# EAGLE board AniBike_v2.5_MainBoard (EAGLE 5.08), part 1 of 2
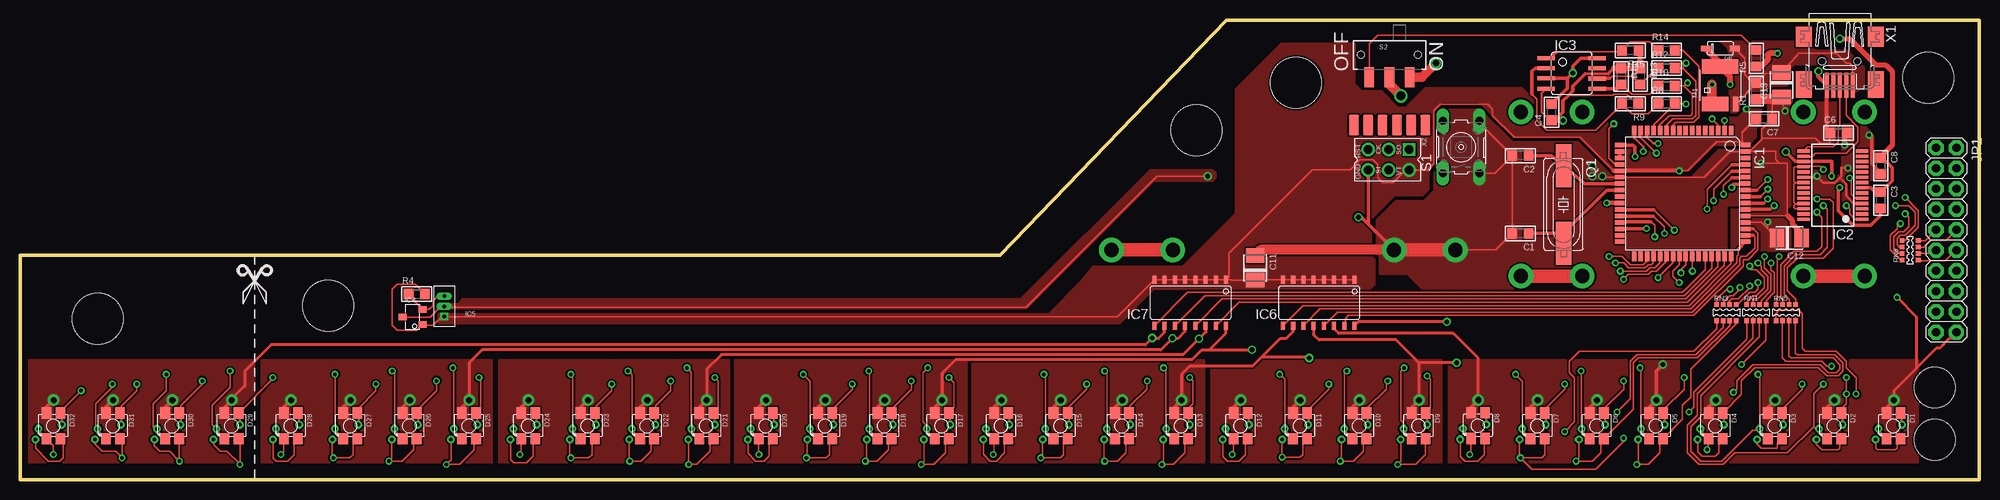
[diagram p0: board, top side]
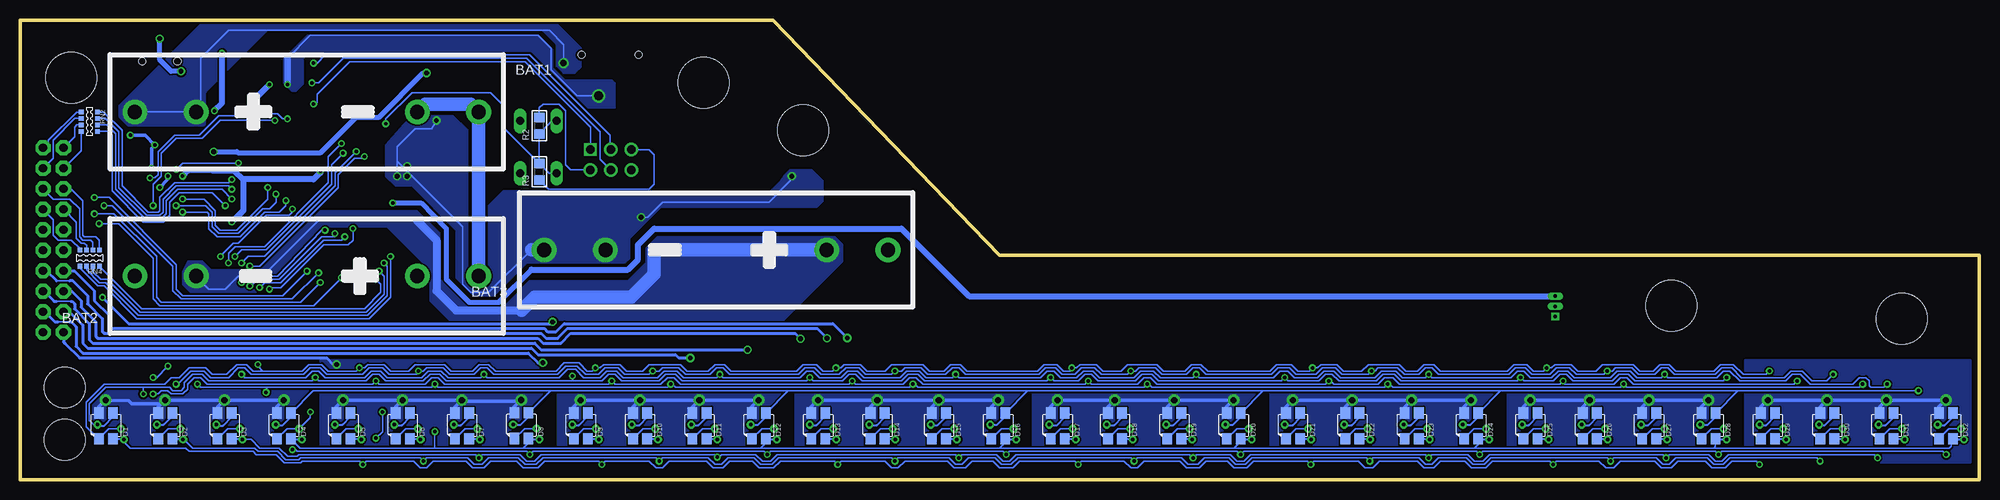
[diagram p1: board, bottom side, seen from below]

Size 243.13 x 57 mm. Coordinates in mm from the lower left corner, seen from the top.
Outline: 243.13,0 0,0 0,27.84 121.56,27.84 149.71,57 243.13,57 243.13,0
Copper layers (1*16): Top 0.035mm / dielectric 1.5mm / Bottom 0.035mm
Design rules "default *": minimum track width 7mil, minimum drill 15mil, track to track 8mil, track to pad 8mil, pad to pad 8mil, via to via 8mil, smd to smd 8mil, copper to edge 10mil, drill to drill 15mil, minimum pad ring 10mil, minimum via ring 8mil, stop-mask expansion 4mil, vias tented up to drill 0mil, thermal gap 10mil
Holes 6.35 mm at 236.78,49.83 9.6,19.96 38.25,21.59 145.95,43.33 158.34,49.23
Holes 5.08 mm at 237.59,4.93 237.59,11.43

## Footprints (pad centres in the part's own frame; a part is rotated, then mirrored left to right if it is on the bottom)
BATTERY_AAA = drill 1.778 pad 3.048 round: MINUS1 21.336,0; MINUS2 13.716,0; PLUS1 -21.336,0; PLUS2 -13.716,0
C0805 = smd 1.2 x 1.3: 1 -1.016,0; 2 1.016,0
C3528-21/T = smd 1.778 x 2.286: + 1.524,0; - -1.524,0
LED1210_DS = drill 0.432 pad 0.889 round: 1 -1.913,-0.353; 2 -2.25,-1.68; 3 1,0.15 | smd 1.2 x 1.4 bottom: 1_BOTTOM 0.85,-1.6; 2_BOTTOM -0.9,-1.6; 3_BOTTOM -0.9,1.6; 4_BOTTOM 0.85,1.6 | smd 1.2 x 1.4: 1_TOP -0.9,-1.6; 2_TOP 0.85,-1.6; 3_TOP 0.85,1.6; 4_TOP -0.9,1.6 | drill 0.762 pad 1.422 round: 4 0,3.2
SOD-123 = smd 1.2 x 0.7: ANODE -1.82,0; CATHODE 1.82,0
TQFP64 = smd 1.194 x 0.559: 1 -7.8,6; 2 -7.8,5.2; 3 -7.8,4.4; 4 -7.8,3.6; 5 -7.8,2.8; 6 -7.8,2; 7 -7.8,1.2; 8 -7.8,0.4; 9 -7.8,-0.4; 10 -7.8,-1.2; 11 -7.8,-2; 12 -7.8,-2.8; 13 -7.8,-3.6; 14 -7.8,-4.4; 15 -7.8,-5.2; 16 -7.8,-6; 33 7.8,-6; 34 7.8,-5.2; 35 7.8,-4.4; 36 7.8,-3.6; 37 7.8,-2.8; 38 7.8,-2; 39 7.8,-1.2; 40 7.8,-0.4; 41 7.8,0.4; 42 7.8,1.2; 43 7.8,2; 44 7.8,2.8; 45 7.8,3.6; 46 7.8,4.4; 47 7.8,5.2; 48 7.8,6 | smd 0.559 x 1.194: 17 -6,-7.8; 18 -5.2,-7.8; 19 -4.4,-7.8; 20 -3.6,-7.8; 21 -2.8,-7.8; 22 -2,-7.8; 23 -1.2,-7.8; 24 -0.4,-7.8; 25 0.4,-7.8; 26 1.2,-7.8; 27 2,-7.8; 28 2.8,-7.8; 29 3.6,-7.8; 30 4.4,-7.8; 31 5.2,-7.8; 32 6,-7.8; 49 6,7.8; 50 5.2,7.8; 51 4.4,7.8; 52 3.6,7.8; 53 2.8,7.8; 54 2,7.8; 55 1.2,7.8; 56 0.4,7.8; 57 -0.4,7.8; 58 -1.2,7.8; 59 -2,7.8; 60 -2.8,7.8; 61 -3.6,7.8; 62 -4.4,7.8; 63 -5.2,7.8; 64 -6,7.8
SSOP28 = smd 0.4 x 1.5: 1 -4.225,-3.625; 2 -3.575,-3.625; 3 -2.925,-3.625; 4 -2.275,-3.625; 5 -1.625,-3.625; 6 -0.975,-3.625; 7 -0.325,-3.625; 8 0.325,-3.625; 9 0.975,-3.625; 10 1.625,-3.625; 11 2.275,-3.625; 12 2.925,-3.625; 13 3.575,-3.625; 14 4.225,-3.625; 15 4.225,3.625; 16 3.575,3.625; 17 2.925,3.625; 18 2.275,3.625; 19 1.625,3.625; 20 0.975,3.625; 21 0.325,3.625; 22 -0.325,3.625; 23 -0.975,3.625; 24 -1.625,3.625; 25 -2.275,3.625; 26 -2.925,3.625; 27 -3.575,3.625; 28 -4.225,3.625
SOIC8 = smd 0.5 x 2.2: 1 -1.905,-3.154; 2 -0.645,-3.154; 3 0.625,-3.154; 4 1.895,-3.154; 5 1.905,3.154; 6 0.635,3.154; 7 -0.635,3.154; 8 -1.905,3.154
HALL_SENSOR_SE = smd 1 x 0.8: 1 1.15,-1; 2 1.15,0.9; 3 -1.35,-0.05
HALL_SENSOR_UA = drill 0.45 square: 1 0,-1.27 | drill 0.45 long: 2 0,0; 3 0,1.27
SOIC16 = smd 0.5 x 1: 1 -4.41,-2.84; 2 -3.14,-2.84; 3 -1.87,-2.84; 4 -0.6,-2.84; 5 0.67,-2.84; 6 1.94,-2.84; 7 3.21,-2.84; 8 4.48,-2.84; 9 4.48,2.84; 10 3.21,2.84; 11 1.94,2.84; 12 0.67,2.84; 13 -0.6,2.84; 14 -1.87,2.84; 15 -3.14,2.84; 16 -4.41,2.84
2X10 = drill 1.016 pad 1.88 octagon: 1 -11.43,-1.27; 2 -11.43,1.27; 3 -8.89,-1.27; 4 -8.89,1.27; 5 -6.35,-1.27; 6 -6.35,1.27; 7 -3.81,-1.27; 8 -3.81,1.27; 9 -1.27,-1.27; 10 -1.27,1.27; 11 1.27,-1.27; 12 1.27,1.27; 13 3.81,-1.27; 14 3.81,1.27; 15 6.35,-1.27; 16 6.35,1.27; 17 8.89,-1.27; 18 8.89,1.27; 19 11.43,-1.27; 20 11.43,1.27
PMOS_SO-8 = smd 3.3 x 1.78: 1 -0.635,-2.326 | smd 0.72 x 1.78: 2 1.905,-2.326 | smd 4.53 x 1.78: 3 0,2.326
HC49UP = smd 5.334 x 1.93: 1 -4.826,0; 2 4.826,0
R0805 = smd 1.2 x 1.3: 1 -1.016,0; 2 1.016,0
YCTC164 = smd 0.559 x 0.6: P$1 -1.2,-1.003; P$2 -0.4,-1.003; P$3 0.4,-1.003; P$4 1.2,-1.003; P$5 1.2,1.003; P$6 0.4,1.003; P$7 -0.4,1.003; P$8 -1.2,1.003
B3F-10XX = drill 1.016 long: 1 -3.251,2.261; 2 3.251,2.261; 3 -3.251,-2.261; 4 3.251,-2.261
SWITCH-SPDT-SMD = smd 1.2 x 2.5: 1 -2.5,-2.75; 2 0,-2.75; 3 2.5,-2.75 | hole 0.9: -3.55,0; 3.55,0
32005-201 = smd 3.1 x 0.5: 1 3,1.6; 2 3,0.8; 3 3,0; 4 3,-0.8; 5 3,-1.6 | smd 2.5 x 2: M1 -3,-4.45; M2 -3,4.45 | smd 3.3 x 2: M3 2.9,4.45; M4 2.9,-4.45 | hole 0.9: 0,2.2; 0,-2.2
AVR_ISP_ANIBIKE = drill 1.067 square: 1 0,2.54 | drill 1.067 pad 1.676 round: 2 2.54,2.54; 3 0,0; 4 2.54,0; 5 0,-2.54; 6 2.54,-2.54 | smd 2.54 x 1.27: 7 -3.048,2.794; 8 -3.048,4.572; 9 -3.048,-0.762; 10 -3.048,1.016; 11 -3.048,-2.54; 12 -3.048,-4.318

## Placement (x,y rotation side)
BAT1  BATTERY_AAA  [BATTERY_AAA]  207.57,45.62 0 bottom
BAT2  BATTERY_AAA  [BATTERY_AAA]  207.57,25.25 180 bottom
BAT3  BATTERY_AAA  [BATTERY_AAA]  156.77,28.5 180 bottom
C1  22pF  [C0805]  186.18,30.53 180 top
C2  22pF  [C0805]  186.18,40.18 180 top
C3  100nF  [C0805]  230.89,34.65 270 top
C4  100nF  [C0805]  190.07,45.59 90 top
C6  100nF  [C0805]  225.65,42.98 0 top
C7  100nF  [C0805]  216.41,44.75 180 top
C8  100nF  [C0805]  230.89,38.91 270 top
C11  47uF  [C3528-21/T]  153.26,26.26 270 top
C12  10uF  [C3528-21/T]  219.56,29.97 180 top
C13  10uF  [C3528-21/T]  218.59,48.97 90 top
D1  LED_RGB_DS  [LED1210_DS]  232.51,6.65 0 top
D2  LED_RGB_DS  [LED1210_DS]  225.15,6.65 0 top
D3  LED_RGB_DS  [LED1210_DS]  217.78,6.65 0 top
D4  LED_RGB_DS  [LED1210_DS]  210.41,6.65 0 top
D5  LED_RGB_DS  [LED1210_DS]  203.05,6.65 0 top
D6  LED_RGB_DS  [LED1210_DS]  195.68,6.65 0 top
D7  LED_RGB_DS  [LED1210_DS]  188.32,6.65 0 top
D8  LED_RGB_DS  [LED1210_DS]  180.95,6.68 0 top
D9  LED_RGB_DS  [LED1210_DS]  173.58,6.65 0 top
D10  LED_RGB_DS  [LED1210_DS]  166.22,6.65 0 top
D11  LED_RGB_DS  [LED1210_DS]  158.85,6.65 0 top
D12  LED_RGB_DS  [LED1210_DS]  151.49,6.65 0 top
D13  LED_RGB_DS  [LED1210_DS]  144.12,6.65 0 top
D14  LED_RGB_DS  [LED1210_DS]  136.75,6.65 0 top
D15  LED_RGB_DS  [LED1210_DS]  129.13,6.65 0 top
D16  LED_RGB_DS  [LED1210_DS]  121.77,6.65 0 top
D17  LED_RGB_DS  [LED1210_DS]  114.4,6.65 0 top
D18  LED_RGB_DS  [LED1210_DS]  107.29,6.65 0 top
D19  LED_RGB_DS  [LED1210_DS]  99.92,6.65 0 top
D20  LED_RGB_DS  [LED1210_DS]  92.56,6.65 0 top
D21  LED_RGB_DS  [LED1210_DS]  85.19,6.65 0 top
D22  LED_RGB_DS  [LED1210_DS]  77.83,6.65 0 top
D23  LED_RGB_DS  [LED1210_DS]  70.46,6.65 0 top
D24  LED_RGB_DS  [LED1210_DS]  63.09,6.65 0 top
D25  LED_RGB_DS  [LED1210_DS]  55.73,6.65 0 top
D26  LED_RGB_DS  [LED1210_DS]  48.36,6.65 0 top
D27  LED_RGB_DS  [LED1210_DS]  41,6.65 0 top
D28  LED_RGB_DS  [LED1210_DS]  33.63,6.65 0 top
D29  LED_RGB_DS  [LED1210_DS]  26.26,6.65 0 top
D30  LED_RGB_DS  [LED1210_DS]  18.9,6.65 0 top
D31  LED_RGB_DS  [LED1210_DS]  11.53,6.65 0 top
D32  LED_RGB_DS  [LED1210_DS]  4.17,6.65 0 top
D40  SM5819A  [SOD-123]  210.97,53.49 180 top
IC1  ATMEGA325P  [TQFP64]  206.3,35.51 270 top
IC2  FT232RL  [SSOP28]  224.94,36.53 90 top
IC3  AT26DF321  [SOIC8]  192.53,50.39 270 top
IC4  HALL_SENSORSMT  [HALL_SENSOR_SE]  48.82,20.22 0 top
IC5  HALL_SENSORTH  [HALL_SENSOR_UA]  52.63,21.49 0 top
IC6  MMPQ2222  [SOIC16]  161.19,21.95 180 top
IC7  MMPQ2222  [SOIC16]  145.24,21.95 180 top
JP1  [2X10]  239.01,29.72 270 top
M1  IRF7404  [PMOS_SO-8]  210.97,48.92 0 top
Q1  20MHz  [HC49UP]  191.52,34.14 270 top
R1  3000  [R0805]  215.44,48.21 90 top
R2  5K  [R0805]  178.71,43.89 90 bottom
R3  100  [R0805]  178.71,38.2 90 bottom
R4  10K  [R0805]  49.23,23.01 0 top
R5  3000  [R0805]  215.44,52.27 90 top
R8  301  [R0805]  204.32,46.63 0 top
R9  650  [R0805]  199.8,46.63 180 top
R10  301  [R0805]  204.32,48.84 0 top
R11  650  [R0805]  198.65,50.01 270 top
R12  301  [R0805]  204.32,51.05 0 top
R13  650  [R0805]  201.04,50.01 270 top
R14  15k  [R0805]  204.32,53.24 0 top
R15  33k  [R0805]  199.82,53.24 180 top
RN1  RESISTOR_ARR4  [YCTC164]  215.44,20.73 0 top
RN2  RESISTOR_ARR4  [YCTC164]  234.54,44.4 270 bottom
RN3  RESISTOR_ARR4  [YCTC164]  211.73,20.73 0 top
RN4  RESISTOR_ARR4  [YCTC164]  234.49,27.48 180 bottom
RN5  RESISTOR_ARR4  [YCTC164]  219.13,20.73 0 top
RN6  RESISTOR_ARR4  [YCTC164]  234.54,28.45 90 top
S1  Open  [B3F-10XX]  178.82,41.25 90 top
S2  [SWITCH-SPDT-SMD]  169.93,52.68 0 top
X1  MINI-USB-32005-201  [32005-201]  225.81,51.92 270 top
X2  AVR_ISP_ANIBIKE  [AVR_ISP_ANIBIKE]  169.82,40.94 270 top

## Library data of the parts
BAT1-BAT3 C1-C4 C6-C8 C11-C13 IC3 Q1 R1-R5 S1 X1 = AniBike_v3.0_Library
D1-D32 D40 IC4-IC7 M1 R8-R15 RN1-RN6 X2 = AniBike_Common_Library
IC1 = atmel
IC2 = ftdichip
JP1 S2 = SparkFun

## Nets
+3V3: C3.2 C4.2 IC2.17 IC3.3 IC3.8
+5V: C6.2 C7.2 C8.2 C11.+ C12.+ D40.CATHODE IC1.21 IC1.52 IC1.64 IC2.4 IC2.20 IC4.1 IC5.1 IC6.1 IC6.2 IC6.3 IC6.4 IC6.5 IC6.6 IC6.7 IC6.8 IC7.1 IC7.2 IC7.3 IC7.4 IC7.5 IC7.6 IC7.7 IC7.8 M1.3 R2.2 R4.2 X2.2
CS: IC1.10 R14.2
CS_FLASH: IC3.1 R14.1 R15.2
D+: IC2.15 X1.3
D-: IC2.16 X1.2
GND: BAT3.MINUS1 BAT3.MINUS2 C1.2 C2.2 C3.1 C4.1 C6.1 C7.1 C8.1 C11.- C12.- C13.- IC1.22 IC1.53 IC1.63 IC2.7 IC2.18 IC2.21 IC2.25 IC2.26 IC3.4 IC4.3 IC5.2 R1.1 R5.1 R9.1 R11.1 R13.1 R15.1 S1.3 S1.4 X1.5 X2.6
INT_SENSOR: IC1.26 IC4.2 IC5.3 R4.1
L1_B1: IC1.61 RN5.P$8
L1_B1_LED: D1.3 D1.3_BOTTOM D1.3_TOP D5.3 D5.3_BOTTOM D5.3_TOP D9.3 D9.3_BOTTOM D9.3_TOP D13.3 D13.3_BOTTOM D13.3_TOP D17.3 D17.3_BOTTOM D17.3_TOP D21.3 D21.3_BOTTOM D21.3_TOP D25.3 D25.3_BOTTOM D25.3_TOP D29.3 D29.3_BOTTOM D29.3_TOP RN5.P$1
L1_B2: IC1.60 RN5.P$7
L1_B2_LED: D2.3 D2.3_BOTTOM D2.3_TOP D6.3 D6.3_BOTTOM D6.3_TOP D10.3 D10.3_BOTTOM D10.3_TOP D14.3 D14.3_BOTTOM D14.3_TOP D18.3 D18.3_BOTTOM D18.3_TOP D22.3 D22.3_BOTTOM D22.3_TOP D26.3 D26.3_BOTTOM D26.3_TOP D30.3 D30.3_BOTTOM D30.3_TOP RN5.P$2
L1_B3: IC1.59 RN5.P$6
L1_B3_LED: D3.3 D3.3_BOTTOM D3.3_TOP D7.3 D7.3_BOTTOM D7.3_TOP D11.3 D11.3_BOTTOM D11.3_TOP D15.3 D15.3_BOTTOM D15.3_TOP D19.3 D19.3_BOTTOM D19.3_TOP D23.3 D23.3_BOTTOM D23.3_TOP D27.3 D27.3_BOTTOM D27.3_TOP D31.3 D31.3_BOTTOM D31.3_TOP RN5.P$3
L1_B4: IC1.58 RN5.P$5
L1_B4_LED: D4.3 D4.3_BOTTOM D4.3_TOP D8.3 D8.3_BOTTOM D8.3_TOP D12.3 D12.3_BOTTOM D12.3_TOP D16.3 D16.3_BOTTOM D16.3_TOP D20.3 D20.3_BOTTOM D20.3_TOP D24.3 D24.3_BOTTOM D24.3_TOP D28.3 D28.3_BOTTOM D28.3_TOP D32.3 D32.3_BOTTOM D32.3_TOP RN5.P$4
L1_G1: IC1.27 RN3.P$5
L1_G1_LED: D1.2 D1.2_BOTTOM D1.2_TOP D5.2 D5.2_BOTTOM D5.2_TOP D9.2 D9.2_BOTTOM D9.2_TOP D13.2 D13.2_BOTTOM D13.2_TOP D17.2 D17.2_BOTTOM D17.2_TOP D21.2 D21.2_BOTTOM D21.2_TOP D25.2 D25.2_BOTTOM D25.2_TOP D29.2 D29.2_BOTTOM D29.2_TOP RN3.P$4
L1_G2: IC1.28 RN3.P$6
L1_G2_LED: D2.2 D2.2_BOTTOM D2.2_TOP D6.2 D6.2_BOTTOM D6.2_TOP D10.2 D10.2_BOTTOM D10.2_TOP D14.2 D14.2_BOTTOM D14.2_TOP D18.2 D18.2_BOTTOM D18.2_TOP D22.2 D22.2_BOTTOM D22.2_TOP D26.2 D26.2_BOTTOM D26.2_TOP D30.2 D30.2_BOTTOM D30.2_TOP RN3.P$3
L1_G3: IC1.29 RN3.P$7
L1_G3_LED: D3.2 D3.2_BOTTOM D3.2_TOP D7.2 D7.2_BOTTOM D7.2_TOP D11.2 D11.2_BOTTOM D11.2_TOP D15.2 D15.2_BOTTOM D15.2_TOP D19.2 D19.2_BOTTOM D19.2_TOP D23.2 D23.2_BOTTOM D23.2_TOP D27.2 D27.2_BOTTOM D27.2_TOP D31.2 D31.2_BOTTOM D31.2_TOP RN3.P$2
L1_G4: IC1.30 RN3.P$8
L1_G4_LED: D4.2 D4.2_BOTTOM D4.2_TOP D8.2 D8.2_BOTTOM D8.2_TOP D12.2 D12.2_BOTTOM D12.2_TOP D16.2 D16.2_BOTTOM D16.2_TOP D20.2 D20.2_BOTTOM D20.2_TOP D24.2 D24.2_BOTTOM D24.2_TOP D28.2 D28.2_BOTTOM D28.2_TOP D32.2 D32.2_BOTTOM D32.2_TOP RN3.P$1
L1_R1: IC1.14 RN1.P$5
L1_R1_LED: D1.1 D1.1_BOTTOM D1.1_TOP D5.1 D5.1_BOTTOM D5.1_TOP D9.1 D9.1_BOTTOM D9.1_TOP D13.1 D13.1_BOTTOM D13.1_TOP D17.1 D17.1_BOTTOM D17.1_TOP D21.1 D21.1_BOTTOM D21.1_TOP D25.1 D25.1_BOTTOM D25.1_TOP D29.1 D29.1_BOTTOM D29.1_TOP RN1.P$4
L1_R2: IC1.16 RN1.P$7
L1_R2_LED: D2.1 D2.1_BOTTOM D2.1_TOP D6.1 D6.1_BOTTOM D6.1_TOP D10.1 D10.1_BOTTOM D10.1_TOP D14.1 D14.1_BOTTOM D14.1_TOP D18.1 D18.1_BOTTOM D18.1_TOP D22.1 D22.1_BOTTOM D22.1_TOP D26.1 D26.1_BOTTOM D26.1_TOP D30.1 D30.1_BOTTOM D30.1_TOP RN1.P$2
L1_R3: IC1.15 RN1.P$6
L1_R3_LED: D3.1 D3.1_BOTTOM D3.1_TOP D7.1 D7.1_BOTTOM D7.1_TOP D11.1 D11.1_BOTTOM D11.1_TOP D15.1 D15.1_BOTTOM D15.1_TOP D19.1 D19.1_BOTTOM D19.1_TOP D23.1 D23.1_BOTTOM D23.1_TOP D27.1 D27.1_BOTTOM D27.1_TOP D31.1 D31.1_BOTTOM D31.1_TOP RN1.P$3
L1_R4: IC1.17 RN1.P$8
L1_R4_LED: D4.1 D4.1_BOTTOM D4.1_TOP D8.1 D8.1_BOTTOM D8.1_TOP D12.1 D12.1_BOTTOM D12.1_TOP D16.1 D16.1_BOTTOM D16.1_TOP D20.1 D20.1_BOTTOM D20.1_TOP D24.1 D24.1_BOTTOM D24.1_TOP D28.1 D28.1_BOTTOM D28.1_TOP D32.1 D32.1_BOTTOM D32.1_TOP RN1.P$1
L2_B1: IC1.39 RN6.P$8
L2_B1_LED: JP1.12 RN6.P$1
L2_B2: IC1.40 RN6.P$7
L2_B2_LED: JP1.11 RN6.P$2
L2_B3: IC1.41 RN6.P$6
L2_B3_LED: JP1.10 RN6.P$3
L2_B4: IC1.42 RN6.P$5
L2_B4_LED: JP1.9 RN6.P$4
L2_G1: IC1.35 RN4.P$5
L2_G1_LED: JP1.8 RN4.P$4
L2_G2: IC1.36 RN4.P$6
L2_G2_LED: JP1.7 RN4.P$3
L2_G3: IC1.37 RN4.P$7
L2_G3_LED: JP1.6 RN4.P$2
L2_G4: IC1.38 RN4.P$8
L2_G4_LED: JP1.5 RN4.P$1
L2_R1: IC1.57 RN2.P$8
L2_R1_LED: JP1.2 RN2.P$1
L2_R2: IC1.56 RN2.P$7
L2_R2_LED: JP1.4 RN2.P$2
L2_R3: IC1.55 RN2.P$6
L2_R3_LED: JP1.1 RN2.P$3
L2_R4: IC1.54 RN2.P$5
L2_R4_LED: JP1.3 RN2.P$4
L2_SENSE_IN: IC1.34
L2_SENSE_OUT: IC1.33
MISO: IC1.13 R8.2 X2.1
MISO_FLASH: IC3.2 R8.1 R9.2
MOSI: IC1.12 R10.2 X2.4
MOSI_FLASH: IC3.5 R10.1 R11.2
N$1: C2.1 IC1.23 Q1.1
N$2: C1.1 IC1.24 Q1.2
N$4: BAT2.MINUS1 BAT2.MINUS2 BAT3.PLUS1 BAT3.PLUS2
N$5: BAT1.MINUS1 BAT1.MINUS2 BAT2.PLUS1 BAT2.PLUS2
N$6: R5.2 S2.1
N$7: IC1.18 IC1.19
N$8: IC1.20 R2.1 R3.2 S1.1 S1.2
RESET: R3.1 X2.5
ROW1: IC1.51 IC6.15
ROW1_LED: D1.4 D1.4_BOTTOM D1.4_TOP D2.4 D2.4_BOTTOM D2.4_TOP D3.4 D3.4_BOTTOM D3.4_TOP D4.4 D4.4_BOTTOM D4.4_TOP IC6.16 JP1.20
ROW2: IC1.50 IC6.13
ROW2_LED: D5.4 D5.4_BOTTOM D5.4_TOP D6.4 D6.4_BOTTOM D6.4_TOP D7.4 D7.4_BOTTOM D7.4_TOP D8.4 D8.4_BOTTOM D8.4_TOP IC6.14 JP1.19
ROW3: IC1.49 IC6.11
ROW3_LED: D9.4 D9.4_BOTTOM D9.4_TOP D10.4 D10.4_BOTTOM D10.4_TOP D11.4 D11.4_BOTTOM D11.4_TOP D12.4 D12.4_BOTTOM D12.4_TOP IC6.12 JP1.18
ROW4: IC1.48 IC6.9
ROW4_LED: D13.4 D13.4_BOTTOM D13.4_TOP D14.4 D14.4_BOTTOM D14.4_TOP D15.4 D15.4_BOTTOM D15.4_TOP D16.4 D16.4_BOTTOM D16.4_TOP IC6.10 JP1.17
ROW5: IC1.47 IC7.15
ROW5_LED: D17.4 D17.4_BOTTOM D17.4_TOP D18.4 D18.4_BOTTOM D18.4_TOP D19.4 D19.4_BOTTOM D19.4_TOP D20.4 D20.4_BOTTOM D20.4_TOP IC7.16 JP1.16
ROW6: IC1.46 IC7.13
ROW6_LED: D21.4 D21.4_BOTTOM D21.4_TOP D22.4 D22.4_BOTTOM D22.4_TOP D23.4 D23.4_BOTTOM D23.4_TOP D24.4 D24.4_BOTTOM D24.4_TOP IC7.14 JP1.15
ROW7: IC1.45 IC7.11
ROW7_LED: D25.4 D25.4_BOTTOM D25.4_TOP D26.4 D26.4_BOTTOM D26.4_TOP D27.4 D27.4_BOTTOM D27.4_TOP D28.4 D28.4_BOTTOM D28.4_TOP IC7.12 JP1.14
ROW8: IC1.44 IC7.9
ROW8_LED: D29.4 D29.4_BOTTOM D29.4_TOP D30.4 D30.4_BOTTOM D30.4_TOP D31.4 D31.4_BOTTOM D31.4_TOP D32.4 D32.4_BOTTOM D32.4_TOP IC7.10 JP1.13
RXD: IC1.3 IC2.5
SCK: IC1.11 R12.2 X2.3
SCK_FLASH: IC3.6 R12.1 R13.2
TXD: IC1.2 IC2.1
USB5V: C13.+ D40.ANODE M1.2 R1.2 X1.1
VCC_BAT: BAT1.PLUS1 BAT1.PLUS2 S2.3
VCC_SW_BAT: M1.1 S2.2

## Tracks (layer width: path | path; a pad name or v marks a point on that pad's centre or on a via)
+3V3  (via drill 0.43, 0.6)
  Top 0.203: 195.66,52.27 IC3.8
  Top 0.406: C3.2 230.89,32.77 229.67,31.55 227.43,31.55 225.6,33.38 225.6,35.81 v225.81,36.22 | v219.1,40.69 220.32,39.47 221.3,39.47 IC2.17 222.35,39.47 224.79,39.47 v224.79,37.64 | 192.01,49.77 v192.68,50.44 192.68,51.26 193.7,52.27 195.66,52.27 | 192.01,49.77 IC3.3 | C4.2 192.01,48.55 192.01,49.77
  Bottom 0.406: v224.79,37.64 224.79,37.24 v225.81,36.22
  Bottom 0.61: v192.68,50.44 193.09,50.44 198.58,44.96 201.42,44.96 205.82,40.56 216.13,40.56 216.26,40.69 v219.1,40.69
+5V  (via drill 0.43)
  Top 0.203: 230.89,38.05 C8.2 | 213.7,41.91 210.57,41.91 206.96,38.31 v205.89,38.31 | 213.7,41.91 IC1.64 | IC1.52 216.1,31.91 216.86,31.14 | 216.86,31.14 C12.+ | IC7.1 IC7.2 IC7.3 IC7.4 IC7.5 IC7.6 IC7.7 IC7.8 136.19,20.22 IC5.1 52.32,20.22 51.26,19.15 50.04,19.15 IC4.1 49.9,19.22 49.22,18.54 46.79,18.54 46.18,19.15 46.18,23.62 46.79,24.23 49.02,24.23 R4.2 | IC6.8 IC6.7 IC6.6 IC6.5 IC6.4 IC6.3 IC6.2 IC6.1 | IC6.8 156.27,24.79 | IC7.1 150.26,24.79 150.31,24.74 C11.+ 153.31,24.79 IC6.8 | v216.86,31.95 216.86,31.14 | 213.7,41.91 213.7,43.06 C7.2 215.39,44.81 v214.22,45.97 | IC1.21 198.3,38.3 | 197.71,38.3 193.57,42.44 185.45,42.44 182.73,45.16 182.73,45.97 182.12,46.58 176.22,46.58 175.41,45.77 175.41,39.27 174.55,38.4 X2.2 171.91,38.4 170.33,36.83 169.11,36.83 168.5,37.44 168.5,39.07 167.89,39.67 166.27,39.67 165.05,38.46 160.38,38.46 150.01,28.09 150.01,25.15 IC7.1 | M1.3 210.97,51.67
  Top 0.305: IC2.4 227.57,34.25 226.62,35.2 226.62,36.63 225.81,37.44 | v226.82,38.66 226.01,38.66 226.01,37.64 225.81,37.44 | IC2.20 223.22,37.5 v222.96,37.64 223.77,36.83 225.2,36.83 225.81,37.44
  Top 0.406: 230.89,38.05 229.77,39.17 229.77,42.42 v229.46,42.72
  Top 0.508: v205.89,38.31 IC1.21 | 198.3,38.3 197.71,38.3
  Top 0.61: v226.42,41.5 226.42,42.93 C6.2
  Top 0.762: 210.97,51.67 D40.CATHODE | M1.3 212.19,50.03 v212.19,49.02
  Bottom 0.203: X2.2 172.41,38.46 174.8,38.46 175.41,39.07 175.41,45.77 176.22,46.58 178.26,46.58 178.71,46.13 R2.2
  Bottom 0.406: v226.82,38.66 226.82,41.1 v226.42,41.5 227.63,42.72 v229.46,42.72
  Bottom 0.762: v222.96,37.64 222.25,38.35 216.48,38.28 215.44,37.24 | 215.44,37.24 206.7,37.24 205.89,38.05 v205.89,38.31 | 215.44,37.24 215.44,33.38 v216.86,31.95 | v212.19,49.02 214.22,46.99 v214.22,45.97
  pour Top (no thermals): 227.76,34.65 229.08,34.65 229.08,31.42 219.79,31.5 219.71,31.34 219.71,28.68 219.38,28.35 215.06,28.35 214.76,28.65 213.08,28.65 212.37,28.55 212.37,33.55 214.07,33.55 214.25,32.36 220.12,32.36 220.12,38.38 223.32,38.38 223.9,37.77 226.09,37.74 226.09,39.07 226.11,43.97 226.24,44.09 228.78,44.09 230.05,42.57 230.05,38.51 231.57,38.51 231.57,37.24 231.44,37.11 227,37.11 226.57,36.68 226.57,36.25
  pour Top (no thermals): 214.02,45.97 216.05,45.97 216.05,44.35 215.44,43.74 215.44,42.52 214.43,41.5 210.16,41.5 207.11,38.46 197.56,38.46 193.5,42.52 185.37,42.52 181.1,46.79 176.43,46.79 175.41,45.77 175.41,39.07 174.8,38.46 174.8,36.02 173.99,35.2 170.54,35.2 167.69,32.36 167.69,27.69 168.1,27.28 168.1,24.23 167.49,23.62 140.67,23.62 136.4,19.35 52.07,19.35 51.87,19.56 51.87,20.78 52.07,20.57 127.66,20.57 131.72,24.64 133.15,26.47 144.32,26.47 150.83,32.97 150.83,48.41 156.51,54.1 165.66,54.1 165.66,49.02 166.47,48.21 168.91,48.21 170.94,46.18 171.96,46.18 174.4,48.62 186.39,48.62 188.01,46.99 188.01,44.55 189.23,43.33 195.53,43.33 198.17,45.97 207.52,45.97 208.53,44.96 213.21,44.96 213.82,45.57 213.82,45.77
CS
  Top 0.203: IC1.10 205.1,43.96 205.49,44.35 207.72,44.35 208.33,44.96 208.33,51.26 206.35,53.24 R14.2
CS_FLASH
  Top 0.203: R14.1 202.23,54.31 199.8,54.31 198.81,53.31 R15.2 198.65,53.09 190.65,53.09 | 189.86,52.3 IC3.1
  Top 0.406: 190.65,53.09 189.86,52.3
D+
  Top 0.203: IC2.15 221.87,41.3 224.99,41.3 225.6,41.91 225.6,43.74 225.81,43.94 X1.3
D-
  Top 0.203: IC2.16 221.34,40.08 222.35,40.08 222.76,40.49 226.62,40.49 228.04,41.91 228.04,43.74 226.61,45.17 X1.2
GND  (via drill 0.43, 0.6)
  Top 0.203: 224.18,50.11 224.19,49.83 224.21,49.81 X1.5 | 228.59,36.22 IC2.7 | C8.1 231.04,39.93 | IC2.26 221.3,33.58 220.32,33.58 220.12,33.78 220.12,33.99 220.38,34.25 IC2.25 221.26,34.19 220.32,34.19 220.12,34.39 220.12,36.63 220.34,36.85 IC2.21 221.3,36.83 220.32,36.83 220.12,37.03 220.12,38.66 220.26,38.8 IC2.18 221.38,38.86 223.37,38.86 v223.77,38.46 | IC1.63 217.86,40.71 217.88,40.69 217.88,39.67 218.29,39.27 | 218.29,39.27 219.3,39.27 219.3,32.77 219.25,32.71 IC1.53 | C12.- 221.34,29.01 | v216.05,39.27 218.29,39.27 | C2.2 C1.2 183.13,28.5 BAT3.MINUS1 | 216.15,42.21 214.65,40.71 IC1.63 | 216.15,42.21 216.26,42.32 222.76,42.32 223.37,41.71 224.59,41.71 224.59,42.93 C6.1 224.21,43.41 | IC1.63 214.08,40.69 212.19,40.69 209.01,37.51 IC1.22 196.46,37.51 v196.34,37.64 | 201.04,53.04 R15.1 | C2.2 181.08,44.27 S1.4 | C2.2 182.98,38 S1.3 | 190.47,44.58 C4.1 189.81,44.58 189.84,44.55 | R9.1 200.25,47.19 200,47.19 199.39,47.8 197.76,47.8 197.66,47.7 192.18,47.7 | 216.15,42.21 216.15,43.48 C7.1 217.42,46.76 217.86,47.19 C13.- 218.26,47.57 v219.02,45.75 | IC4.3 50.85,20.17 52.17,21.49 IC5.2 52.73,21.39 124.82,21.39 141.07,37.64 v147.37,37.64
  Top 0.254: IC3.4 188.82,47.94 188.82,45.57 189.81,44.58
  Top 0.305: 194.23,50.37 197.08,50.37
  Top 0.406: 228.59,36.22 229.67,36.22 230.23,35.66 C3.1 232.31,37.08 232.31,38.66 231.04,39.93 | 197.08,50.37 197.76,51.05 | 194.23,50.37 192.68,48.82 192.68,48.21 192.18,47.7 191.46,46.99 191.46,45.57 190.47,44.58
  Top 0.457: 167.28,31.7 X2.6 | v166.06,32.56 166.42,32.56 167.28,31.7 | BAT3.MINUS2 167.28,31.7
  Top 0.508: 224.21,43.41 X1.5 223.16,49.96 v223.16,50.65
  Top 0.61: 201.04,53.04 R13.1 R11.1 197.87,51.05 197.76,51.05 | v191.46,44.55 189.84,44.55 | C8.1 230.89,40.03 232.31,41.45 232.31,50.65 231.5,51.46 230.28,51.46 227.02,54.71 v225.81,54.71
  Top 0.635: 219.3,32.77 219.91,32.16 219.91,31.75 220.93,30.73 C12.-
  Top 0.762: R5.1 216.05,51.26 216.86,52.07 216.86,52.68 217.07,52.88 v218.08,52.88
  Top 1.27: 217.86,47.19 R1.1 | C11.- 153.97,28.5 BAT3.MINUS2
  Top 1.676: BAT3.MINUS1 BAT3.MINUS2
  Bottom 0.203: v216.05,39.27 222.96,39.27 v223.77,38.46 | v191.46,44.55 192.07,43.54 194.11,43.54 196.34,41.3 196.34,39.47 | v196.34,37.64 196.34,39.47 | 196.34,39.47 188.21,31.34 188.21,24.23 187.2,23.22 184.96,23.22 179.68,28.5 | v166.06,32.56 165.25,32.56 163.42,34.39 150.22,34.39 147.37,37.24 v147.37,37.64
  Bottom 0.61: v225.81,54.71 225.81,52.07 224.38,50.65 v223.16,50.65
  Bottom 0.762: v218.08,52.88 218.06,46.71 v219.02,45.75
  Bottom 1.676: 179.68,28.5 BAT3.MINUS1
  other vias: 195.12,37.64 195.12,38.86
  pour Bottom (no thermals): 177.04,35.81 183.13,35.81 184.96,33.99 184.96,24.84 185.98,23.83 186.59,23.83 187.6,24.84 187.6,43.33 189.43,45.16 194.54,45.16 197.76,41.5 197.76,37.64 196.55,36.42 194.51,36.42 189.03,30.94 189.03,25.04 186.79,22.81 184.35,22.81 180.29,26.87 168.1,26.87 167.49,27.48 167.49,29.92 163.63,33.78 144.32,33.78 143.51,34.59 143.51,37.03 144.93,38.46 147.57,38.46 148.18,37.85 148.79,37.03 150.22,35.61 176.83,35.61
  pour Top (no thermals): 168.3,28.09 168.3,32.16 170.74,34.59 174.19,34.59 175.41,35.81 175.41,38.05 176.02,38.66 176.02,45.36 176.63,45.97 181.1,45.97 185.17,41.91 193.29,41.91 197.76,37.44 207.31,37.44 210.77,40.89 215.04,40.89 215.04,41.1 216.05,42.11 216.05,43.54 216.87,44.35 216.87,47.6 217.47,48.21 219.91,48.21 219.91,46.79 230.28,46.79 230.48,46.58 230.48,45.57 229.87,44.75 225.6,44.75 225.6,40.08 219.71,40.08 219.71,33.99 219.3,33.58 219.3,32.77 214.63,32.77 214.63,33.99 211.79,33.99 211.79,24.84 209.96,23.01 209.96,19.15 207.92,17.12 180.49,17.12 172.16,25.45 168.71,25.45 168.71,27.69
  pour Top (no thermals): 147.78,38.46 140.26,38.46 124.21,22.4 54.91,22.4 54.51,22 54.31,21.79 52.07,21.79 52.07,21.39 52.27,21.18 124.82,21.18 140.67,37.03 147.98,37.03 148.39,37.44 148.39,38.05 147.98,38.46
INT_SENSOR  (via drill 0.43)
  Top 0.203: IC1.26 198.37,34.32 | IC5.3 52.48,22.61 51.66,22.61 51.26,22.2 51.26,21.59 50.79,21.12 IC4.2 48.21,22.88 R4.1
  Top 0.559: 198.37,34.32 v196.9,34.32
  Bottom 0.61: v196.9,34.32 193.4,34.32 190.25,31.14 190.25,24.84 187.4,22 183.74,22 179.68,26.06
  Bottom 0.762: 179.68,26.06 167.69,26.06 166.47,27.28 166.47,29.11 164.44,31.14 133.76,31.14 125.37,22.76 IC5.3
L1_B1  (via drill 0.43)
  Top 0.203: IC1.61 214.05,39.07 | 212.39,39.07 209.35,36.02 v209.35,33.58 | v218.29,27.69 218.08,27.48 218.08,22.61 217.93,22.45 RN5.P$8
  Top 0.406: 214.05,39.07 212.39,39.07
  Bottom 0.203: v218.29,27.69 216.66,29.31 216.05,29.31 212.6,32.77 209.75,32.77 209.35,33.17 v209.35,33.58
L1_B1_LED  (via drill 0.43)
  Top 0.203: 204.05,8.1 204.05,8.77 206.5,11.23 v206.5,12.65 | D29.3_TOP 31.34,12.48 v31.34,12.65 | v56.95,12.65 57.15,12.45 57.15,8.79 56.62,8.25 D25.3_TOP 56.73,8.1 D25.3 | v86.21,12.65 86.61,12.24 86.61,8.99 86.04,8.42 D21.3_TOP 86.19,8.1 D21.3 | v115.26,12.65 115.87,12.04 115.87,8.99 115.25,8.37 D17.3_TOP 115.4,8.1 D17.3 | v145.14,12.65 145.54,12.24 145.54,9.4 144.97,8.83 D13.3_TOP 144.97,6.95 D13.3 | v174.6,12.85 175.01,12.45 175.01,8.99 174.43,8.42 D9.3_TOP | D1.3_TOP 233.4,8.25 | v227.84,10.62 227.84,12.65 226.62,13.87 226.62,14.68 225.4,15.9 221.54,15.9 221.13,16.31 221.13,20.57 220.73,20.98 218.26,20.98 217.88,20.57 217.88,20.17 RN5.P$1
  Top 0.254: D1.3 233.51,8.1 D1.3_TOP | D5.3 204.05,8.1 D5.3_TOP | D9.3 174.58,8.1 D9.3_TOP | D29.3_TOP 27.26,8.1 D29.3
  Bottom 0.203: v31.34,12.65 31.75,12.24 42.72,12.24 43.54,13.06 44.75,13.06 45.57,12.24 50.44,12.24 51.26,13.06 52.07,13.06 52.88,12.24 56.54,12.24 v56.95,12.65 57.35,12.24 71.78,12.24 72.59,13.06 74.02,13.06 74.83,12.24 79.5,12.24 80.31,13.06 81.13,13.06 81.94,12.24 85.8,12.24 v86.21,12.65 86.61,12.24 101.85,12.24 102.67,13.06 103.89,13.06 104.7,12.24 109.37,12.24 110.18,13.06 111,13.06 111.81,12.24 114.86,12.24 v115.26,12.65 115.67,12.24 130.91,12.24 131.72,13.06 132.94,13.06 133.76,12.24 138.63,12.24 139.45,13.06 140.26,13.06 141.07,12.24 144.73,12.24 v145.14,12.65 145.54,12.24 160.98,12.24 161.8,13.06 163.02,13.06 163.83,12.24 168.5,12.24 169.32,13.06 170.13,13.06 170.94,12.24 174.6,12.24 | 174.6,12.24 v174.6,12.85 | 174.6,12.24 190.25,12.24 191.06,13.06 192.28,13.06 193.09,12.24 197.76,12.24 198.58,13.06 199.39,13.06 200.2,12.24 206.1,12.24 v206.5,12.65 206.91,12.24 219.71,12.24 220.52,13.06 221.74,13.06 222.76,12.04 222.76,11.43 223.16,11.02 224.18,11.02 224.59,11.43 227.84,11.43 | 227.84,11.43 232.51,11.43 234.54,9.4 234.54,7.37 233.98,6.8 D1.3 | 227.84,11.43 v227.84,10.62
  Bottom 0.254: D1.3_BOTTOM 231.61,7.78 232.69,6.71 233.41,6.71 D1.3 | D5.3_BOTTOM 202.15,7.78 203.12,6.81 D5.3 | D9.3_BOTTOM 172.68,7.86 173.79,6.76 174.53,6.76 D9.3 | D13.3_BOTTOM 143.22,7.86 144.32,6.76 145.07,6.76 D13.3 | D17.3_BOTTOM 113.5,7.71 114.45,6.76 115.35,6.76 D17.3 | D21.3_BOTTOM 84.29,7.66 85.19,6.76 86.14,6.76 D21.3 | D25.3_BOTTOM 54.83,7.86 55.93,6.76 56.68,6.76 D25.3 | D29.3_BOTTOM 25.36,7.86 26.47,6.76 27.21,6.76 D29.3
L1_B2  (via drill 0.43)
  Top 0.203: 214.04,38.25 IC1.60 | 212.39,38.25 210.16,36.02 v210.16,34.59 | v222.96,33.17 223.57,32.56 223.57,28.91 222.96,28.3 220.12,28.3 218.49,26.67 218.49,22.61 218.73,22.37 RN5.P$7
  Top 0.406: 212.39,38.25 214.04,38.25
  Bottom 0.203: v222.96,33.17 219.91,33.17 219.71,32.97 219.71,31.14 218.69,30.12 215.85,30.12 212.8,33.17 210.97,33.17 210.16,33.99 v210.16,34.59
L1_B2_LED  (via drill 0.43)
  Top 0.203: 19.9,8.1 19.9,9.13 22.61,11.84 v22.61,12.24 | 49.36,8.1 49.36,8.72 51.66,11.02 v51.66,12.24 | 78.83,8.1 78.83,9.13 80.72,11.02 v80.72,12.24 | 108.29,8.1 108.29,8.92 110.59,11.23 v110.59,12.24 | 137.75,8.1 137.75,9.13 139.85,11.23 v139.85,12.24 | 167.22,8.1 167.22,8.92 169.52,11.23 169.52,12.04 v169.72,12.24 | 196.68,8.1 196.68,8.92 198.98,11.23 v198.98,12.24 | 226.15,8.92 226.62,9.4 v226.62,10.62 v226.62,12.65 | RN5.P$2 218.69,20.1 218.69,15.09 219.1,14.68 223.57,14.68 224.18,14.07 v224.79,14.07
  Top 0.254: 226.15,8.1 D2.3 | 226.15,8.1 D2.3_TOP | D6.3 196.68,8.1 D6.3_TOP | D10.3 167.22,8.1 D10.3_TOP | D14.3 137.75,8.1 D14.3_TOP | D18.3 108.29,8.1 D18.3_TOP | D22.3 78.83,8.1 D22.3_TOP | D26.3 49.36,8.1 D26.3_TOP | D30.3 19.9,8.1 D30.3_TOP | 226.15,8.92 226.15,8.1
  Bottom 0.203: v22.61,12.24 23.01,11.84 42.93,11.84 43.74,12.65 44.55,12.65 45.36,11.84 51.46,11.84 51.66,12.04 v51.66,12.24 52.07,11.84 71.98,11.84 72.8,12.65 73.81,12.65 74.62,11.84 80.11,11.84 80.52,12.24 v80.72,12.24 81.13,11.84 102.06,11.84 102.87,12.65 103.68,12.65 104.5,11.84 110.18,11.84 v110.59,12.24 111,11.84 131.11,11.84 131.93,12.65 132.74,12.65 133.55,11.84 139.45,11.84 v139.85,12.24 140.26,11.84 161.19,11.84 162,12.65 162.81,12.65 163.63,11.84 169.32,11.84 v169.72,12.24 170.13,11.84 190.45,11.84 191.26,12.65 192.07,12.65 192.89,11.84 198.58,11.84 v198.98,12.24 199.39,11.84 219.91,11.84 220.73,12.65 221.54,12.65 222.35,11.84 222.35,11.23 222.96,10.62 224.38,10.62 224.79,11.02 225.6,11.02 226.01,10.62 v226.62,10.62 | v224.79,14.07 226.21,12.65 v226.62,12.65
  Bottom 0.254: D2.3_BOTTOM 224.25,7.89 225.32,6.81 D2.3 | D6.3_BOTTOM 194.78,7.71 195.73,6.76 196.63,6.76 D6.3 | D10.3_BOTTOM 165.32,7.71 166.27,6.76 167.17,6.76 D10.3 | D14.3_BOTTOM 135.85,7.71 136.8,6.76 137.7,6.76 D14.3 | D18.3_BOTTOM 106.39,7.71 107.34,6.76 108.24,6.76 D18.3 | D22.3_BOTTOM 76.93,7.71 77.88,6.76 78.78,6.76 D22.3 | D26.3_BOTTOM 47.46,7.71 48.41,6.76 49.31,6.76 D26.3 | D30.3_BOTTOM 18,7.91 19.15,6.76 19.85,6.76 D30.3
L1_B3  (via drill 0.43)
  Top 0.203: 214.03,37.44 IC1.59 | 212.39,37.44 211.38,36.42 v211.38,35.41 | v223.77,33.99 224.23,33.53 224.23,28.8 223.37,27.89 220.32,27.89 218.9,26.47 218.9,23.01 219.53,22.38 RN5.P$6
  Top 0.406: 212.39,37.44 214.03,37.44
  Bottom 0.203: v223.77,33.99 220.12,33.99 219.3,33.17 219.3,31.34 218.49,30.53 216.05,30.53 213,33.58 212.19,33.58 211.38,34.39 v211.38,35.41
L1_B3_LED  (via drill 0.43)
  Top 0.203: 12.53,8.1 12.53,9.08 14.48,11.02 v14.48,11.84 | 42,8.1 42,8.87 44.14,11.02 v44.14,11.84 | 71.46,8.1 71.46,9.08 73.41,11.02 v73.41,11.84 | 100.92,8.1 100.92,8.87 103.28,11.23 v103.28,11.84 | 130.13,8.1 130.13,9.03 132.33,11.23 v132.33,11.84 | 159.85,8.1 159.85,8.67 162.41,11.23 v162.41,11.84 | 189.32,8.1 189.32,8.87 191.67,11.23 v191.67,11.84 | 218.78,8.1 218.78,8.87 221.13,11.23 v221.13,11.84 | v212.6,10.82 213,11.23 213,12.24 215.04,14.27 223.37,14.27 224.38,13.26 225.4,13.26 225.81,13.67 225.81,14.27 224.99,15.09 219.71,15.09 219.51,15.29 219.51,20.11 RN5.P$3
  Top 0.254: D3.3 218.78,8.1 D3.3_TOP | D7.3 189.32,8.1 D7.3_TOP | D11.3 159.85,8.1 D11.3_TOP | D15.3 130.13,8.1 D15.3_TOP | D19.3 100.92,8.1 D19.3_TOP | D23.3 71.46,8.1 D23.3_TOP | D27.3 42,8.1 D27.3_TOP | D31.3 12.53,8.1 D31.3_TOP
  Bottom 0.203: v14.48,11.84 14.88,11.43 43.74,11.43 v44.14,11.84 44.55,11.43 72.8,11.43 73.2,11.84 v73.41,11.84 73.81,11.43 102.67,11.43 103.07,11.84 v103.28,11.84 103.68,11.43 131.72,11.43 132.13,11.84 v132.33,11.84 132.74,11.43 161.8,11.43 162.2,11.84 v162.41,11.84 162.81,11.43 191.26,11.43 v191.67,11.84 192.07,11.43 212.39,11.43 | 212.39,11.43 220.73,11.43 v221.13,11.84 | v212.6,10.82 212.6,11.23 212.39,11.43
  Bottom 0.254: D3.3_BOTTOM 216.88,7.78 217.96,6.71 218.68,6.71 D3.3 | D7.3_BOTTOM 187.42,7.76 188.42,6.76 189.27,6.76 D7.3 | D11.3_BOTTOM 157.95,7.76 158.95,6.76 159.8,6.76 D11.3 | D15.3_BOTTOM 128.23,7.81 129.29,6.76 130.08,6.76 D15.3 | D19.3_BOTTOM 99.02,7.76 100.02,6.76 100.87,6.76 D19.3 | D23.3_BOTTOM 69.56,7.76 70.56,6.76 71.41,6.76 D23.3 | D27.3_BOTTOM 40.1,7.76 41.1,6.76 41.95,6.76 D27.3 | D31.3_BOTTOM 10.63,7.76 11.63,6.76 12.48,6.76 D31.3
L1_B4  (via drill 0.43)
  Top 0.203: 214.02,36.63 IC1.58 | v222.96,34.8 224.59,34.8 224.99,34.39 224.99,28.7 223.77,27.48 220.52,27.48 219.3,26.26 219.3,23.42 220.33,22.4 RN5.P$5
  Top 0.406: 214.02,36.63 212.6,36.63 212.39,36.42 v212.39,36.22
  Bottom 0.203: v212.39,36.22 212.39,34.8 216.26,30.94 218.29,30.94 218.9,31.55 218.9,33.38 220.32,34.8 v222.96,34.8
L1_B4_LED  (via drill 0.43)
  Top 0.203: 5.17,8.1 5.17,8.62 v7.57,11.02 | D4.3_TOP 213.61,10.61 213.61,12.24 215.24,13.87 223.16,13.87 224.18,12.85 225.6,12.85 226.21,13.46 226.21,14.48 225.2,15.49 220.52,15.49 220.32,15.7 220.32,20.12 RN5.P$4
  Top 0.254: D4.3 211.41,8.1 D4.3_TOP | D8.3 181.95,8.13 D8.3_TOP | D12.3 152.49,8.1 D12.3_TOP | D16.3 122.77,8.1 D16.3_TOP | D20.3 93.56,8.1 D20.3_TOP | D24.3 64.09,8.1 D24.3_TOP | D32.3 5.17,8.1 D32.3_TOP | D28.3_TOP 34.63,8.1 D28.3
  Bottom 0.203: 29.96,11.02 v7.57,11.02 | 29.96,11.02 D28.3_BOTTOM | 59.42,11.02 29.96,11.02 | 59.42,11.02 D24.3_BOTTOM | 88.89,11.02 59.42,11.02 | 88.89,11.02 D20.3_BOTTOM | 118.1,11.02 88.89,11.02 | 118.1,11.02 D16.3_BOTTOM | 147.82,11.02 118.1,11.02 | 147.82,11.02 D12.3_BOTTOM | 177.31,11.02 147.82,11.02 | 177.31,11.02 D8.3_BOTTOM | 177.31,11.02 206.74,11.02 D4.3_BOTTOM
  Bottom 0.254: D4.3_BOTTOM 209.51,7.78 210.54,6.76 211.36,6.76 D4.3 | D8.3_BOTTOM 180.05,7.81 181.1,6.76 181.88,6.76 D8.3 | D12.3_BOTTOM 150.59,7.81 151.64,6.76 152.44,6.76 D12.3 | D16.3_BOTTOM 120.87,7.86 121.97,6.76 122.72,6.76 D16.3 | D20.3_BOTTOM 91.66,7.81 92.71,6.76 93.51,6.76 D20.3 | D24.3_BOTTOM 62.19,7.81 63.25,6.76 64.04,6.76 D24.3 | D28.3_BOTTOM 32.73,7.81 33.78,6.76 34.58,6.76 D28.3 | D32.3_BOTTOM 3.27,7.81 4.32,6.76 5.12,6.76 D32.3
L1_G1  (via drill 0.43)
  Top 0.203: 198.64,33.5 IC1.27 | v205.28,30.94 202.72,33.5 | RN3.P$5 213,21.8 213.21,21.79 214.63,23.22 215.24,23.22 215.65,23.62 v215.65,24.43
  Top 0.406: 202.72,33.5 198.64,33.5
  Bottom 0.203: v205.28,30.94 205.69,30.94 211.18,25.25 213.82,25.25 214.22,24.84 215.24,24.84 v215.65,24.43
L1_G1_LED  (via drill 0.43)
  Top 0.203: 27.18,5.23 27.28,5.13 v27.28,1.88 25.65,3.51 24.84,3.51 24.01,4.33 D29.2 | 27.18,5.23 27.11,5.3 | D25.2 53.48,2.47 v52.88,1.88 54.51,1.88 56.34,3.71 56.34,4.81 D25.2_TOP | D21.2 82.94,1.89 v82.96,1.88 83.97,1.88 85.6,3.51 85.6,4.61 D21.2_TOP | D17.2 112.15,2.22 v111.81,1.88 113.44,1.88 114.86,3.3 114.86,4.66 D17.2_TOP | D13.2 141.87,2.07 v141.68,1.88 143.1,1.88 144.53,3.3 144.53,4.61 D13.2_TOP | D9.2 171.33,2.27 v170.94,1.88 173.18,1.88 174.4,3.1 174.4,5.02 D9.2_TOP | D5.2 200.8,2.07 v200.61,1.88 202.03,1.88 203.45,3.3 203.45,4.61 D5.2_TOP 206.3,7.46 206.3,9.19 207.31,10.21 207.31,13.67 212.93,19.28 RN3.P$4 | D1.2_TOP 232.92,4.61 232.92,3.91 232.71,3.71 230.48,3.71 230.26,3.93 D1.2 | D29.2_TOP 27.11,5.17 27.18,5.23
  Bottom 0.203: v27.28,1.88 27.69,2.29 30.73,2.29 31.55,1.47 33.17,1.47 33.98,2.29 37.44,2.29 38.25,1.47 39.47,1.47 40.28,2.29 44.55,2.29 45.36,1.47 46.38,1.47 47.19,2.29 52.48,2.29 v52.88,1.88 53.29,2.29 60.4,2.29 61.21,1.47 63.04,1.47 63.86,2.29 66.9,2.29 67.72,1.47 68.94,1.47 69.75,2.29 74.42,2.29 75.23,1.47 76.25,1.47 77.06,2.29 82.55,2.29 v82.96,1.88 83.36,2.29 90.07,2.29 90.88,1.47 92.51,1.47 93.32,2.29 95.96,2.29 96.77,1.47 98.4,1.47 99.21,2.29 103.68,2.29 104.5,1.47 105.31,1.47 106.12,2.29 111.4,2.29 v111.81,1.88 112.22,2.29 119.13,2.29 119.94,1.47 121.56,1.47 122.38,2.29 125.02,2.29 125.83,1.47 127.25,1.47 128.07,2.29 133.35,2.29 134.16,1.47 134.98,1.47 135.79,2.29 141.27,2.29 v141.68,1.88 142.09,2.29 148.79,2.29 149.61,1.47 151.43,1.47 152.25,2.29 155.09,2.29 155.9,1.47 157.12,1.47 157.94,2.29 162.61,2.29 163.42,1.47 164.24,1.47 165.05,2.29 170.54,2.29 v170.94,1.88 171.35,2.29 178.05,2.29 178.87,1.47 180.7,1.47 181.51,2.29 184.76,2.29 185.57,1.47 186.99,1.47 187.81,2.29 191.87,2.29 192.68,1.47 193.5,1.47 194.31,2.29 200.2,2.29 v200.61,1.88 201.02,2.29 208.13,2.29 208.33,2.08 210.36,2.08 211.38,3.1 213.82,3.1 214.22,3.51 222.15,3.51 222.55,3.91 229.46,3.91 230.26,4.71 D1.2
  Bottom 0.254: D29.2 25.28,4.97 D29.2_BOTTOM | D25.2 54.75,4.97 D25.2_BOTTOM | D21.2 84.21,4.97 D21.2_BOTTOM | D17.2 113.42,4.97 D17.2_BOTTOM | D13.2 143.14,4.97 D13.2_BOTTOM | D9.2 172.6,4.97 D9.2_BOTTOM | D5.2 202.07,4.97 D5.2_BOTTOM | D1.2 231.53,4.97 D1.2_BOTTOM
L1_G2  (via drill 0.43)
  Top 0.203: 198.61,32.69 IC1.28 | 202.69,32.69 204.06,31.34 v204.06,30.53 | RN3.P$6 211.99,21.79 211.99,22 212.39,22.4 213.21,22.4 214.63,23.83 v214.63,24.03
  Top 0.406: 202.69,32.69 198.61,32.69
  Bottom 0.203: v204.06,30.53 204.06,30.12 205.69,30.12 210.97,24.84 213.61,24.84 214.43,24.03 v214.63,24.03
L1_G2_LED  (via drill 0.43)
  Top 0.203: 19.75,5.35 19.76,5.33 19.76,5.07 | 19.76,5.07 v19.76,2.29 18.54,3.51 17.32,3.51 16.65,4.18 D30.2 | D26.2 46.11,2.63 v45.77,2.29 47.4,2.29 48.82,3.71 48.82,4.66 D26.2_TOP | D22.2 75.58,2.35 v75.64,2.29 77.06,2.29 78.28,3.51 78.28,4.66 D22.2_TOP | D18.2 105.04,2.42 v104.9,2.29 106.32,2.29 107.75,3.71 107.75,4.66 D18.2_TOP | D14.2 134.5,2.35 v134.57,2.29 136.19,2.29 137.21,3.3 137.21,4.66 D14.2_TOP | D10.2 163.97,2.42 v163.83,2.29 165.46,2.29 166.67,3.51 166.67,4.66 D10.2_TOP | D6.2 193.43,2.63 v193.09,2.29 195.12,2.29 196.14,3.3 196.14,4.66 D6.2_TOP 200.2,8.73 200.2,14.48 200.81,15.09 208.13,15.09 212.13,19.09 RN3.P$3 | D2.2_TOP 225.81,4.87 225.81,3.91 225.6,3.71 223.57,3.71 222.9,4.38 D2.2 | 19.76,5.07 D30.2_TOP
  Bottom 0.203: v19.76,2.29 20.17,2.69 30.94,2.69 31.75,1.88 32.97,1.88 33.78,2.69 37.64,2.69 38.46,1.88 39.27,1.88 40.08,2.69 45.36,2.69 v45.77,2.29 46.18,2.69 60.6,2.69 61.42,1.88 62.84,1.88 63.65,2.69 67.11,2.69 67.92,1.88 68.73,1.88 69.54,2.69 75.23,2.69 v75.64,2.29 76.05,2.69 90.27,2.69 91.08,1.88 92.3,1.88 93.12,2.69 96.16,2.69 96.98,1.88 98.2,1.88 99.01,2.69 104.5,2.69 v104.9,2.29 105.31,2.69 119.33,2.69 120.14,1.88 121.36,1.88 122.17,2.69 125.42,2.69 126.24,1.88 127.05,1.88 127.86,2.69 134.16,2.69 v134.57,2.29 134.98,2.69 149,2.69 149.81,1.88 151.23,1.88 152.04,2.69 155.3,2.69 156.11,1.88 156.92,1.88 157.73,2.69 163.42,2.69 v163.83,2.29 164.24,2.69 178.26,2.69 179.07,1.88 180.49,1.88 181.3,2.69 184.96,2.69 185.78,1.88 186.79,1.88 187.6,2.69 192.68,2.69 v193.09,2.29 193.5,2.69 208.33,2.69 208.53,2.49 210.16,2.49 211.18,3.51 213.61,3.51 214.02,3.91 221.74,3.91 222.8,4.97 D2.2
  Bottom 0.254: D30.2 17.92,4.97 D30.2_BOTTOM | D26.2 47.38,4.97 D26.2_BOTTOM | D22.2 76.85,4.97 D22.2_BOTTOM | D18.2 106.31,4.97 D18.2_BOTTOM | D14.2 135.77,4.97 D14.2_BOTTOM | D10.2 165.24,4.97 D10.2_BOTTOM | D6.2 194.7,4.97 D6.2_BOTTOM | D2.2 224.17,4.97 D2.2_BOTTOM
L1_G3  (via drill 0.43)
  Top 0.203: 198.49,32 IC1.29 | 202.39,32 202.84,31.55 v202.84,30.12 | RN3.P$7 211.38,21.77 211.38,22 212.19,22.81 212.6,22.81 213.41,23.62 v213.41,23.83
  Top 0.406: 202.39,32 198.49,32
  Bottom 0.203: v202.84,30.12 203.25,29.72 205.49,29.72 210.77,24.43 212.8,24.43 v213.41,23.83
L1_G3_LED  (via drill 0.43)
  Top 0.203: 12.45,5.13 12.65,4.93 v12.65,2.69 11.84,3.51 10.21,3.51 9.28,4.43 D31.2 | 12.45,5.13 12.38,5.2 | D27.2 38.75,2.81 v38.86,2.69 40.89,2.69 41.3,3.1 41.3,4.51 D27.2_TOP | D23.2 68.21,2.81 v68.33,2.69 70.56,2.69 70.97,3.1 70.97,4.71 D23.2_TOP | D19.2 97.67,2.78 v97.59,2.69 100.02,2.69 100.43,3.1 100.43,4.71 D19.2_TOP | D15.2 126.88,2.93 v126.64,2.69 129.08,2.69 129.49,3.1 129.49,4.56 D15.2_TOP | D11.2 v156.6,2.78 158.84,2.78 159.16,3.1 159.16,4.51 D11.2_TOP | v186.18,2.69 186.07,2.81 D7.2 | D7.2_TOP 189.23,4.99 189.23,3.1 188.82,2.69 v186.18,2.69 | D3.2_TOP 218.08,4.51 218.08,3.91 216.05,3.91 215.53,4.43 D3.2 | RN3.P$2 211.33,18.9 207.92,15.49 200.61,15.49 199.8,14.68 199.8,10.01 v198.17,8.38 | v198.98,5.13 198.98,4.72 195.53,1.27 187.6,1.27 v186.18,2.69 | D31.2_TOP 12.45,5.12 12.45,5.13
  Bottom 0.203: v12.65,2.69 13.06,3.1 31.14,3.1 31.95,2.29 32.77,2.29 33.58,3.1 38.46,3.1 v38.86,2.69 39.27,3.1 60.81,3.1 61.62,2.29 62.64,2.29 63.45,3.1 67.92,3.1 v68.33,2.69 68.73,3.1 90.47,3.1 91.29,2.29 92.1,2.29 92.91,3.1 97.18,3.1 v97.59,2.69 97.99,3.1 119.53,3.1 120.34,2.29 121.16,2.29 121.97,3.1 126.24,3.1 v126.64,2.69 127.05,3.1 149.2,3.1 150.01,2.29 151.03,2.29 151.84,3.1 156.11,3.1 156.51,2.69 v156.6,2.78 156.92,3.1 178.46,3.1 179.27,2.29 180.29,2.29 181.1,3.1 185.78,3.1 v186.18,2.69 186.59,3.1 208.53,3.1 208.74,2.9 209.96,2.9 210.97,3.91 213.41,3.91 214.47,4.97 D3.2 | v198.17,8.38 198.17,5.94 v198.98,5.13
  Bottom 0.254: D31.2 10.55,4.97 D31.2_BOTTOM | D27.2 40.02,4.97 D27.2_BOTTOM | D23.2 69.48,4.97 D23.2_BOTTOM | D19.2 98.94,4.97 D19.2_BOTTOM | D15.2 128.15,4.97 D15.2_BOTTOM | D11.2 157.87,4.97 D11.2_BOTTOM | D7.2 187.34,4.97 D7.2_BOTTOM | D3.2 216.8,4.97 D3.2_BOTTOM
L1_G4  (via drill 0.43)
  Top 0.203: 198.53,31.14 IC1.30 | RN3.P$8 210.57,21.76 210.57,22.4 211.78,23.62 v212.19,23.62
  Top 0.406: v201.83,31.14 198.53,31.14
  Bottom 0.203: v201.83,31.14 201.83,29.72 202.44,29.11 205.49,29.11 210.77,23.83 211.99,23.83 v212.19,23.62
L1_G4_LED  (via drill 0.43)
  Top 0.203: D32.2_TOP 5.33,4.74 5.33,2.69 4.93,2.29 3.5,2.29 1.92,3.88 D32.2 | D28.2_TOP 33.98,4.56 33.98,3.1 33.17,2.29 31.75,2.29 31.38,2.66 D28.2 | D24.2_TOP 63.65,4.76 63.65,2.9 62.84,2.08 61.21,2.08 60.84,2.45 D24.2 | D20.2_TOP 92.91,4.56 92.91,2.9 92.3,2.29 91.29,2.29 90.31,3.27 D20.2 | D16.2_TOP 122.17,4.61 122.17,3.3 121.16,2.29 120.34,2.29 119.52,3.11 D16.2 | D12.2_TOP 152.04,4.76 152.04,3.1 151.23,2.29 149.81,2.29 149.24,2.86 D12.2 | D8.2_TOP 181.71,4.99 181.71,3.1 180.9,2.29 179.27,2.29 178.7,2.86 D8.2 | D4.2_TOP 210.77,4.56 210.77,3.3 210.36,2.9 208.74,2.9 208.16,3.47 D4.2 | RN3.P$1 210.53,18.71 207.72,15.9 193.5,15.9 192.28,14.68 192.28,13.26 192.89,12.65 192.89,7.16 v191.67,5.94
  Bottom 0.203: 209.43,4.97 208.37,3.91 191.67,3.91 | 191.67,3.91 180.7,3.91 | 180.7,3.91 180.05,4.56 D8.2_BOTTOM | 180.7,3.91 151.23,3.91 | 151.23,3.91 150.59,4.56 D12.2_BOTTOM | 151.23,3.91 121.56,3.91 | 121.56,3.91 120.87,4.61 D16.2_BOTTOM | 121.56,3.91 92.51,3.91 | 92.51,3.91 91.66,4.76 D20.2_BOTTOM | 92.51,3.91 62.64,3.91 | 62.64,3.91 62.19,4.35 D24.2_BOTTOM | 62.64,3.91 32.97,3.91 | 32.97,3.91 32.77,4.11 32.77,5.02 D28.2_BOTTOM | 32.97,3.91 3.71,3.91 3.5,4.11 3.5,4.82 D32.2_BOTTOM | v191.67,5.94 191.67,3.91
  Bottom 0.254: D32.2 3.19,4.97 D32.2_BOTTOM | D28.2 32.65,4.97 D28.2_BOTTOM | D24.2 62.11,4.97 D24.2_BOTTOM | D20.2 91.58,4.97 D20.2_BOTTOM | D16.2 120.79,4.97 D16.2_BOTTOM | D12.2 150.51,4.97 D12.2_BOTTOM | D8.2 179.97,5 D8.2_BOTTOM | D4.2 209.43,4.97 D4.2_BOTTOM
L1_R1  (via drill 0.43)
  Top 0.203: IC1.14 201.83,43.18 | RN1.P$5 216.66,21.75 216.66,22.2 217.68,23.22 217.68,25.65 217.27,26.06 v217.27,26.87
  Top 0.305: 201.83,42.52 202.64,41.71 v203.25,41.71
  Top 0.406: 201.83,43.18 201.83,42.52
  Bottom 0.203: v203.25,41.71 204.88,40.08 204.88,36.83 212.8,28.91 216.46,28.91 217.27,28.09 v217.27,26.87
L1_R1_LED  (via drill 0.43)
  Top 0.203: D29.1 23.82,6.83 23.82,9.19 26.06,11.43 v26.06,13.46 | v53.7,13.87 53.81,13.75 D25.1 | v82.75,13.87 83.28,13.34 D21.1 | v112.62,13.87 112.01,13.26 112.01,7.16 112.49,6.69 D17.1 | v141.88,13.87 142.21,13.55 D13.1 | v171.75,13.87 171.35,13.46 171.35,7.37 171.67,7.04 D9.1 | v201.02,13.87 201.13,13.75 D5.1 | RN1.P$4 216.64,17.3 v213.61,14.27
  Top 0.254: D29.1 24.35,6.07 D29.1_TOP | D25.1 53.81,6.07 D25.1_TOP | D21.1 83.28,6.07 D21.1_TOP | D17.1 112.49,6.07 D17.1_TOP | D13.1 142.21,6.07 D13.1_TOP | D9.1 171.67,6.07 D9.1_TOP | D5.1 201.13,6.07 D5.1_TOP | D1.1 230.6,6.07 D1.1_TOP
  Bottom 0.203: D29.1_BOTTOM 25.87,6.3 D29.1 | D25.1_BOTTOM 55.33,6.3 D25.1 | D21.1_BOTTOM 84.79,6.3 D21.1 | D17.1_BOTTOM 114,6.3 D17.1 | D13.1_BOTTOM 143.72,6.3 D13.1 | D9.1_BOTTOM 173.19,6.3 D9.1 | D5.1_BOTTOM 202.65,6.3 D5.1 | D1.1 232.11,6.3 D1.1_BOTTOM 233.45,5.05 234.95,6.55 234.95,9.6 232.71,11.84 225.2,11.84 224.38,12.65 223.37,12.65 222.15,13.87 220.12,13.87 219.3,13.06 217.47,13.06 216.26,14.27 215.04,14.27 214.22,13.46 213,13.46 | v26.06,13.46 26.47,13.06 29.31,13.06 30.53,14.27 32.16,14.27 32.97,13.46 37.64,13.46 38.46,14.27 39.67,14.27 40.49,13.46 42.11,13.46 42.93,14.27 46.79,14.27 47.6,13.46 49.83,13.46 50.65,14.27 52.68,14.27 53.09,13.87 v53.7,13.87 54.1,13.46 55.32,13.46 56.13,14.27 57.76,14.27 58.57,13.46 66.9,13.46 67.72,14.27 68.94,14.27 69.75,13.46 71.17,13.46 71.98,14.27 75.84,14.27 76.66,13.46 78.89,13.46 79.7,14.27 81.74,14.27 82.14,13.87 v82.75,13.87 83.16,13.46 84.58,13.46 85.39,14.27 87.22,14.27 88.04,13.46 95.76,13.46 96.57,14.27 97.79,14.27 98.6,13.46 101.24,13.46 102.06,14.27 105.71,14.27 106.53,13.46 108.76,13.46 109.58,14.27 111.61,14.27 112.01,13.87 112.42,13.87 | 112.42,13.87 v112.62,13.87 | 112.42,13.87 112.83,13.46 113.64,13.46 114.45,14.27 116.08,14.27 116.89,13.46 125.63,13.46 126.44,14.27 127.66,14.27 128.47,13.46 130.3,13.46 131.11,14.27 134.98,14.27 135.79,13.46 138.02,13.46 138.84,14.27 140.87,14.27 141.27,13.87 v141.88,13.87 142.29,13.46 143.51,13.46 144.32,14.27 145.95,14.27 146.76,13.46 154.89,13.46 155.7,14.27 156.92,14.27 157.73,13.46 160.38,13.46 161.19,14.27 165.05,14.27 165.86,13.46 167.89,13.46 168.71,14.27 170.74,14.27 171.14,13.87 v171.75,13.87 172.16,13.46 172.77,13.46 173.79,14.48 175.62,14.48 176.63,13.46 184.15,13.46 184.96,14.27 186.18,14.27 186.99,13.46 189.64,13.46 190.45,14.27 194.11,14.27 194.92,13.46 197.15,13.46 197.97,14.27 200,14.27 200.41,13.87 v201.02,13.87 201.42,13.46 204.88,13.46 205.69,14.27 207.31,14.27 208.13,13.46 213,13.46
  Bottom 0.203: v213.61,14.27 213.61,14.07 213,13.46
L1_R2  (via drill 0.43)
  Top 0.203: RN1.P$7 215.04,22.2 215.24,22.4 215.65,22.4 216.86,23.62 216.86,25.25 216.05,26.06 216.05,26.47 v215.65,26.87
  Top 0.305: 200.3,42.42 201.42,41.3 v201.42,40.69
  Top 0.406: IC1.16 200.3,43.1 200.3,42.42
  Bottom 0.203: v201.42,40.69 204.06,38.05 204.06,36.42 212.8,27.69 214.83,27.69 v215.65,26.87
L1_R2_LED  (via drill 0.43)
  Top 0.203: 16.98,6.07 16.51,6.54 16.51,9.4 18.14,11.02 v18.14,13.06 | v46.18,13.46 46.45,13.19 D26.1 | v75.44,13.46 75.91,12.99 D22.1 | v105.31,13.46 105.38,13.39 D18.1 | v134.57,13.46 134.84,13.19 D14.1 | v164.64,13.46 164.3,13.19 D10.1 | v193.7,13.46 193.77,13.39 D6.1 | v223.77,11.84 222.55,10.62 222.55,6.55 | 222.55,6.55 222.81,6.3 D2.1 | 222.55,6.55 219.3,3.3 212.8,3.3 211.38,1.88 208.33,1.88 206.91,3.3 206.91,6.76 208.13,7.98 208.13,10.62 215.04,17.53 215.04,20.12 RN1.P$2
  Top 0.254: D30.1 16.98,6.07 D30.1_TOP | D26.1 46.45,6.07 D26.1_TOP | D22.1 75.91,6.07 D22.1_TOP | D18.1 105.38,6.07 D18.1_TOP | D14.1 134.84,6.07 D14.1_TOP | D10.1 164.3,6.07 D10.1_TOP | D6.1 193.77,6.07 D6.1_TOP | D2.1 223.23,6.07 D2.1_TOP
  Bottom 0.203: D30.1_BOTTOM 18.5,6.3 D30.1 | D26.1_BOTTOM 47.96,6.3 D26.1 | D22.1_BOTTOM 77.43,6.3 D22.1 | D18.1_BOTTOM 106.89,6.3 D18.1 | D14.1_BOTTOM 136.36,6.3 D14.1 | D10.1_BOTTOM 165.82,6.3 D10.1 | D6.1_BOTTOM 195.28,6.3 D6.1 | D2.1_BOTTOM 224.75,6.3 D2.1 | v18.14,13.06 18.95,12.24 20.78,12.24 22,13.46 23.42,13.46 24.23,12.65 29.51,12.65 30.73,13.87 31.95,13.87 32.77,13.06 37.85,13.06 38.66,13.87 39.47,13.87 40.28,13.06 42.32,13.06 43.13,13.87 45.16,13.87 45.57,13.46 v46.18,13.46 46.58,13.06 50.04,13.06 50.85,13.87 52.48,13.87 53.29,13.06 55.52,13.06 56.34,13.87 57.56,13.87 58.37,13.06 67.11,13.06 67.92,13.87 68.73,13.87 69.54,13.06 71.37,13.06 72.19,13.87 74.62,13.87 75.03,13.46 v75.44,13.46 75.84,13.06 79.1,13.06 79.91,13.87 81.53,13.87 82.35,13.06 84.78,13.06 85.6,13.87 87.02,13.87 87.83,13.06 95.96,13.06 96.77,13.87 97.59,13.87 98.4,13.06 101.45,13.06 102.26,13.87 104.29,13.87 104.7,13.46 v105.31,13.46 105.71,13.06 108.97,13.06 109.78,13.87 111.4,13.87 112.22,13.06 113.84,13.06 114.66,13.87 115.87,13.87 116.69,13.06 125.83,13.06 126.64,13.87 127.46,13.87 128.27,13.06 130.5,13.06 131.32,13.87 133.35,13.87 133.76,13.46 v134.57,13.46 134.98,13.06 138.23,13.06 139.04,13.87 140.66,13.87 141.48,13.06 143.71,13.06 144.53,13.87 145.74,13.87 146.56,13.06 155.09,13.06 155.9,13.87 156.72,13.87 157.53,13.06 160.58,13.06 161.39,13.87 163.42,13.87 163.83,13.46 v164.64,13.46 165.05,13.06 168.1,13.06 168.91,13.87 170.54,13.87 171.35,13.06 172.97,13.06 173.99,14.07 175.41,14.07 176.43,13.06 184.35,13.06 185.17,13.87 185.98,13.87 186.79,13.06 189.84,13.06 190.65,13.87 192.68,13.87 193.09,13.46 193.5,13.46
  Bottom 0.203: 193.5,13.46 v193.7,13.46 | 193.5,13.46 193.9,13.06 197.36,13.06 198.17,13.87 199.8,13.87 200.61,13.06 205.08,13.06 205.89,13.87 207.11,13.87 207.92,13.06 214.43,13.06 215.24,13.87 216.05,13.87 217.27,12.65 219.51,12.65 220.32,13.46 221.94,13.46 223.57,11.84 v223.77,11.84
L1_R3  (via drill 0.43)
  Top 0.203: IC1.15 201.02,43.19 | RN1.P$6 216.05,21.94 216.05,22.2 217.27,23.42 217.27,25.45 216.46,26.26 v216.46,27.69
  Top 0.305: 201.02,42.52 v203.05,40.49
  Top 0.406: 201.02,43.19 201.02,42.52
  Bottom 0.203: v203.05,40.49 204.47,39.07 204.47,36.63 212.6,28.5 215.65,28.5 v216.46,27.69
L1_R3_LED  (via drill 0.43)
  Top 0.203: D31.1 9.4,6.52 9.4,9.4 11.43,11.43 v11.43,11.84 | v39.06,13.06 39.08,13.04 D27.1 | v68.33,13.06 68.55,12.83 D23.1 | v97.18,13.06 98.01,12.23 D19.1 | v127.05,13.06 127.22,12.89 D15.1 | v156.31,13.06 156.94,12.43 D11.1 | v185.57,13.06 186.4,12.23 D7.1 | v215.65,13.06 215.87,12.83 D3.1 215.71,6.15 215.04,6.15 211.18,2.29 208.53,2.29 207.31,3.51 207.31,6.55 208.53,7.77 208.53,10.41 215.85,17.73 215.85,20.12 RN1.P$3
  Top 0.254: D31.1 9.62,6.07 D31.1_TOP | D27.1 39.08,6.07 D27.1_TOP | D23.1 68.55,6.07 D23.1_TOP | D19.1 98.01,6.07 D19.1_TOP | D15.1 127.22,6.07 D15.1_TOP | D11.1 156.94,6.07 D11.1_TOP | D7.1 186.4,6.07 D7.1_TOP | D3.1 215.87,6.07 D3.1_TOP
  Bottom 0.203: D31.1_BOTTOM 11.13,6.3 D31.1 | D27.1_BOTTOM 40.6,6.3 D27.1 | D23.1_BOTTOM 70.06,6.3 D23.1 | D19.1_BOTTOM 99.53,6.3 D19.1 | D15.1_BOTTOM 128.74,6.3 D15.1 | D11.1_BOTTOM 158.45,6.3 D11.1 | D7.1_BOTTOM 187.92,6.3 D7.1 | D3.1_BOTTOM 217.38,6.3 D3.1 | v11.43,11.84 11.84,11.43 13.46,11.43 13.66,11.63 13.66,12.24 14.07,12.65 14.88,12.65 15.7,11.84 20.98,11.84 22.2,13.06 23.22,13.06 24.03,12.24 29.72,12.24 30.94,13.46 31.75,13.46 32.56,12.65 38.66,12.65 v39.06,13.06 39.47,12.65 42.52,12.65 43.33,13.46 44.96,13.46 45.77,12.65 50.24,12.65 51.05,13.46 52.27,13.46 53.09,12.65 55.73,12.65 56.54,13.46 57.35,13.46 58.17,12.65 67.92,12.65 v68.33,13.06 68.73,12.65 71.58,12.65 72.39,13.46 74.22,13.46 75.03,12.65 79.3,12.65 80.11,13.46 81.33,13.46 82.14,12.65 84.99,12.65 85.8,13.46 86.82,13.46 87.63,12.65 96.77,12.65 v97.18,13.06 97.59,12.65 101.65,12.65 102.46,13.46 104.09,13.46 104.9,12.65 109.17,12.65 109.98,13.46 111.2,13.46 112.01,12.65 114.05,12.65 114.86,13.46 115.67,13.46 116.48,12.65 126.64,12.65 v127.05,13.06 127.46,12.65 130.71,12.65 131.52,13.46 133.15,13.46 133.96,12.65 138.43,12.65 139.24,13.46 140.46,13.46 141.27,12.65 143.92,12.65 144.73,13.46 145.54,13.46 146.35,12.65 155.9,12.65 v156.31,13.06 156.72,12.65 160.78,12.65 161.59,13.46 163.22,13.46 164.03,12.65 168.3,12.65 169.11,13.46 170.33,13.46 171.14,12.65 173.18,12.65 174.19,13.67 175.21,13.67 176.22,12.65 185.17,12.65 v185.57,13.06 185.98,12.65 190.04,12.65 190.86,13.46 192.48,13.46 193.29,12.65 197.56,12.65 198.37,13.46 199.59,13.46 200.41,12.65 205.28,12.65 206.1,13.46 206.91,13.46 207.72,12.65 215.24,12.65 v215.65,13.06
L1_R4  (via drill 0.43)
  Top 0.203: IC1.17 | v214.63,26.47 214.63,26.26 214.83,26.06 215.44,26.06 216.46,25.04 216.46,23.83 215.44,22.81 215.04,22.81 214.24,22.02 RN1.P$8
  Top 0.406: IC1.17 200.2,41.5 200.41,41.3 v200.41,40.08
  Bottom 0.203: v200.41,40.08 200.61,39.88 201.62,39.88 203.66,37.85 203.66,36.22 213.41,26.47 v214.63,26.47
L1_R4_LED  (via drill 0.43)